# Altium PCB Transformer_25_3_caseD.PcbDoc
Units mm, origin at the board's own origin, x right, y up, seen from the top; angles counter-clockwise.
Board outline 118 x 78 mm, 6 copper layers (Top Layer, Layer 2, Layer 3, Layer 4, Layer 5, Bottom Layer), stack 0.816 mm thick; 4 components, 8 nets, 26 pads, 20 vias.
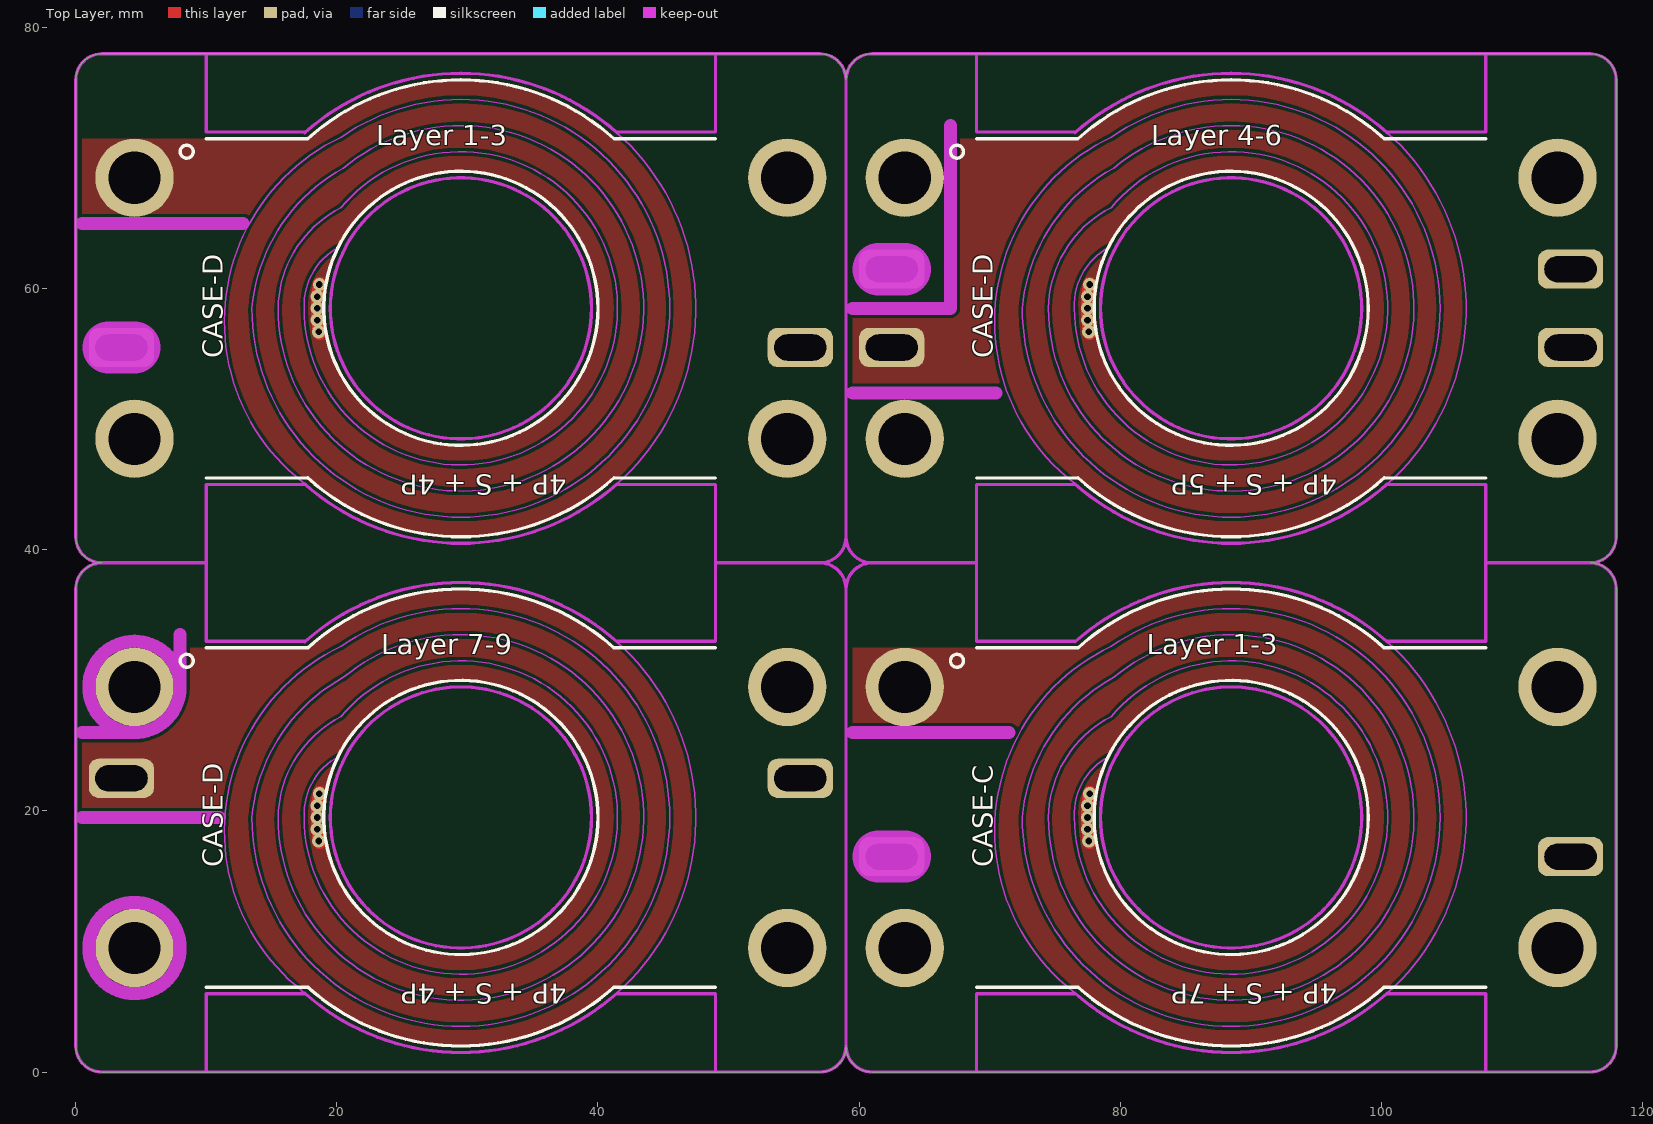
[diagram p0: Top Layer view]
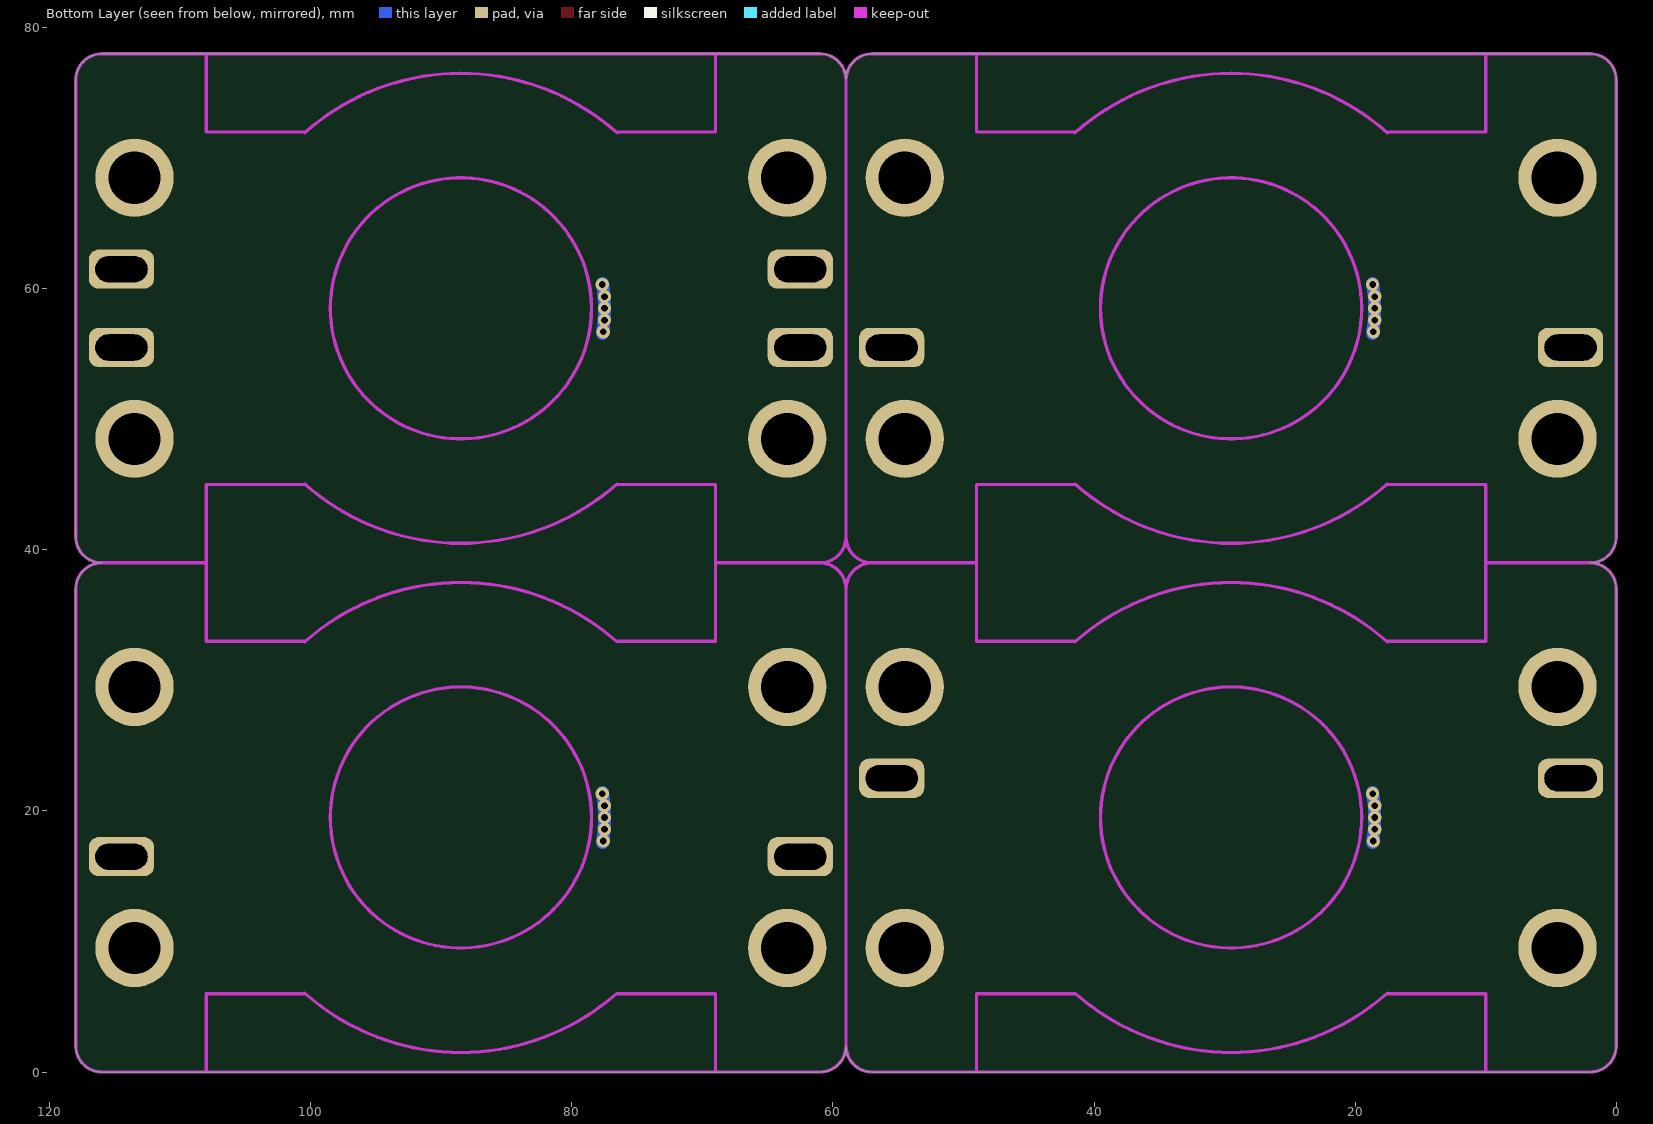
[diagram p1: Bottom Layer view, seen from below]
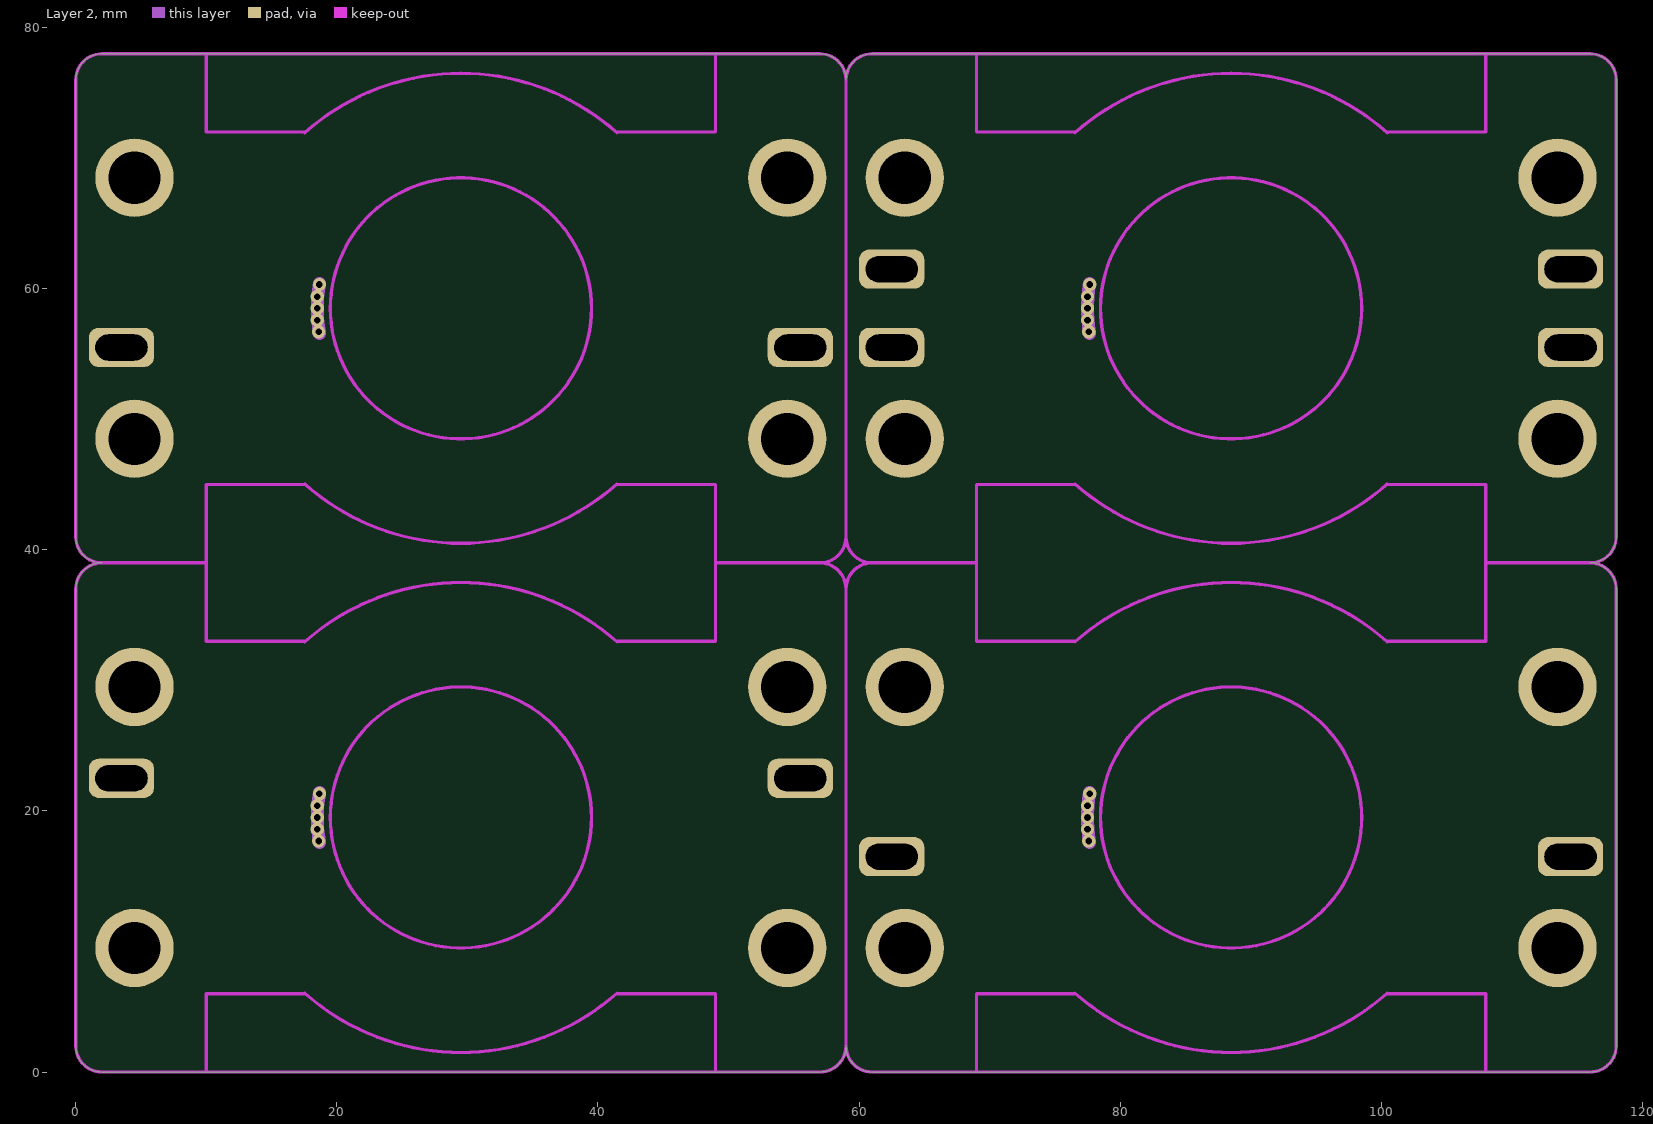
[diagram p2: Layer 2]
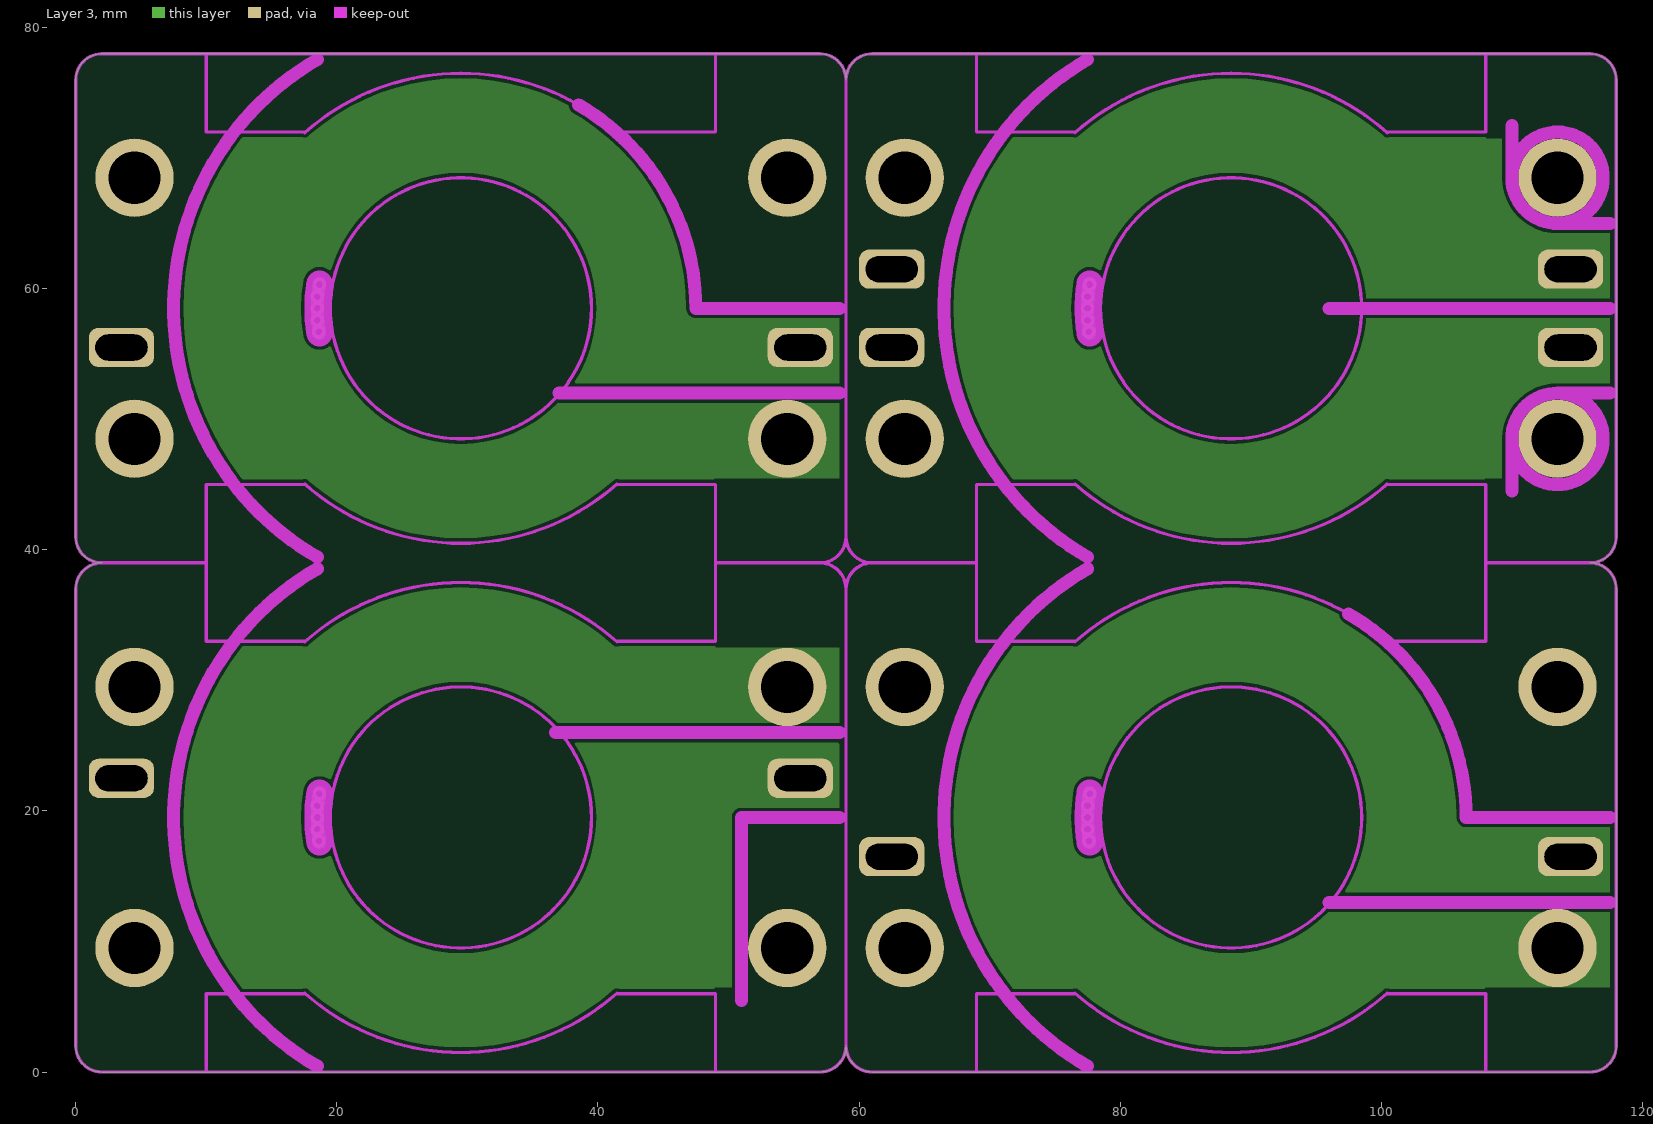
[diagram p3: Layer 3]
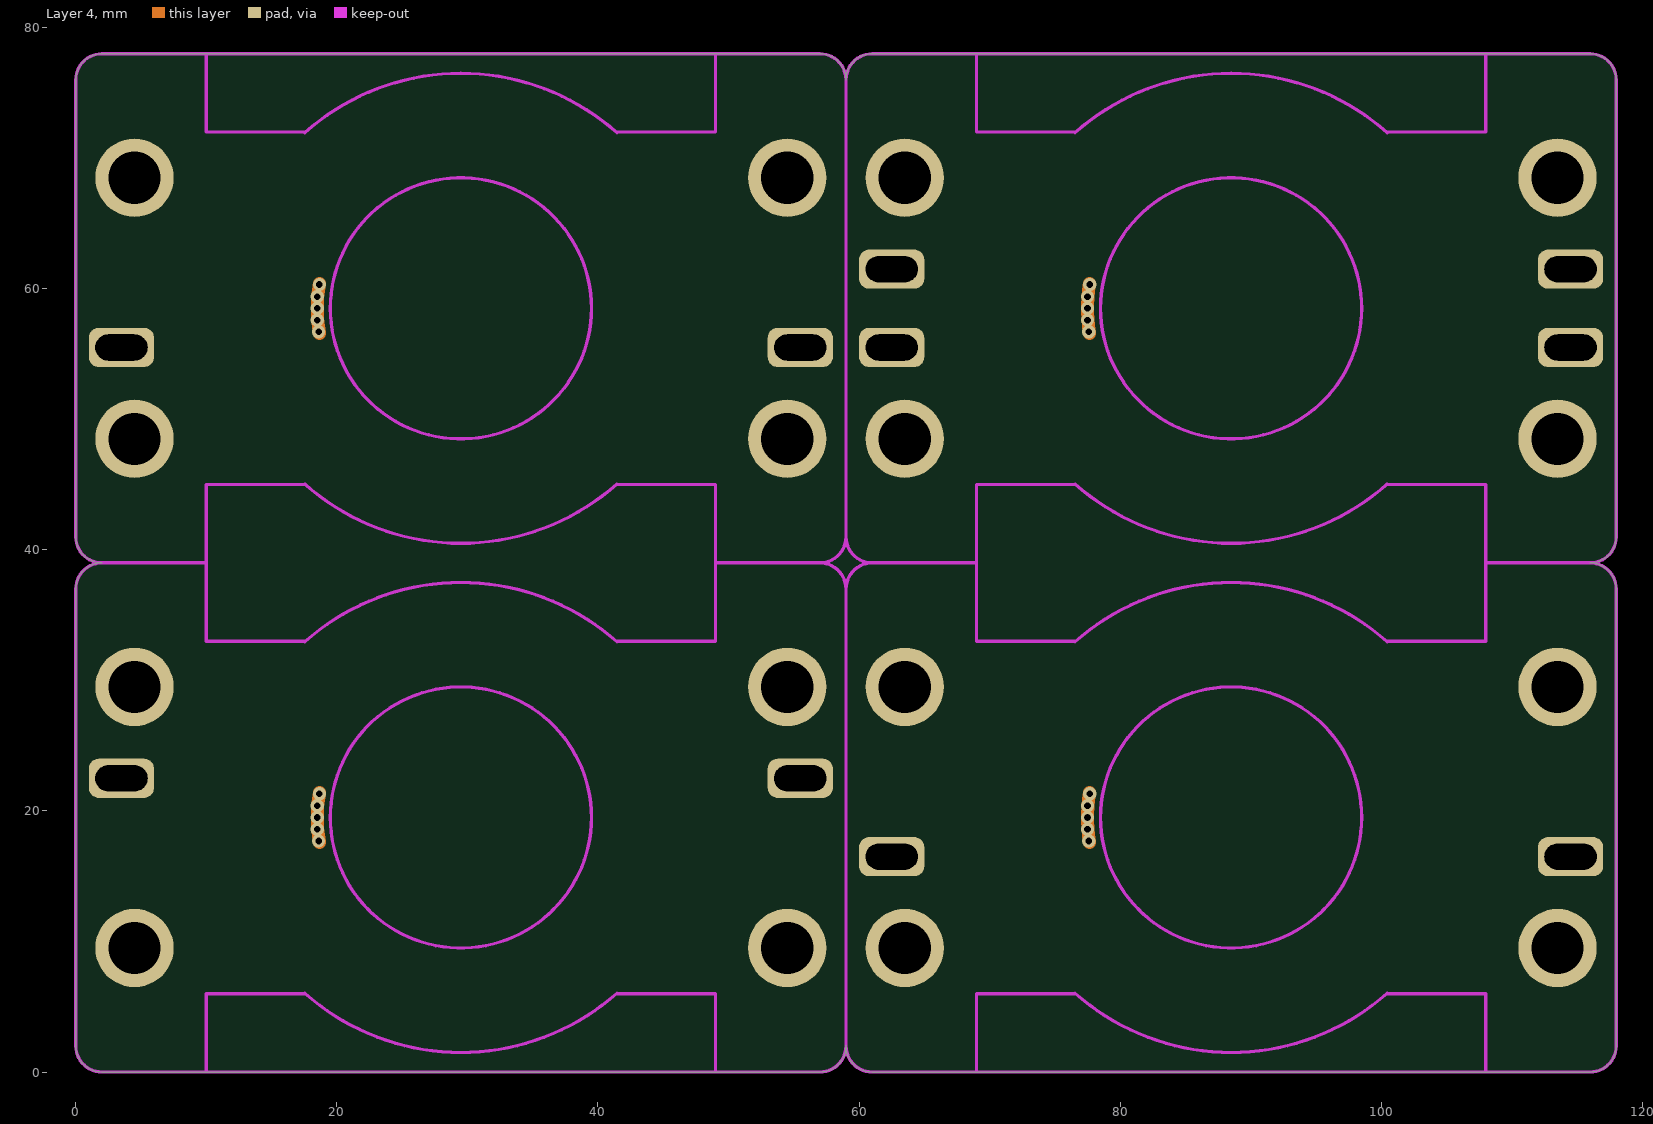
[diagram p4: Layer 4]
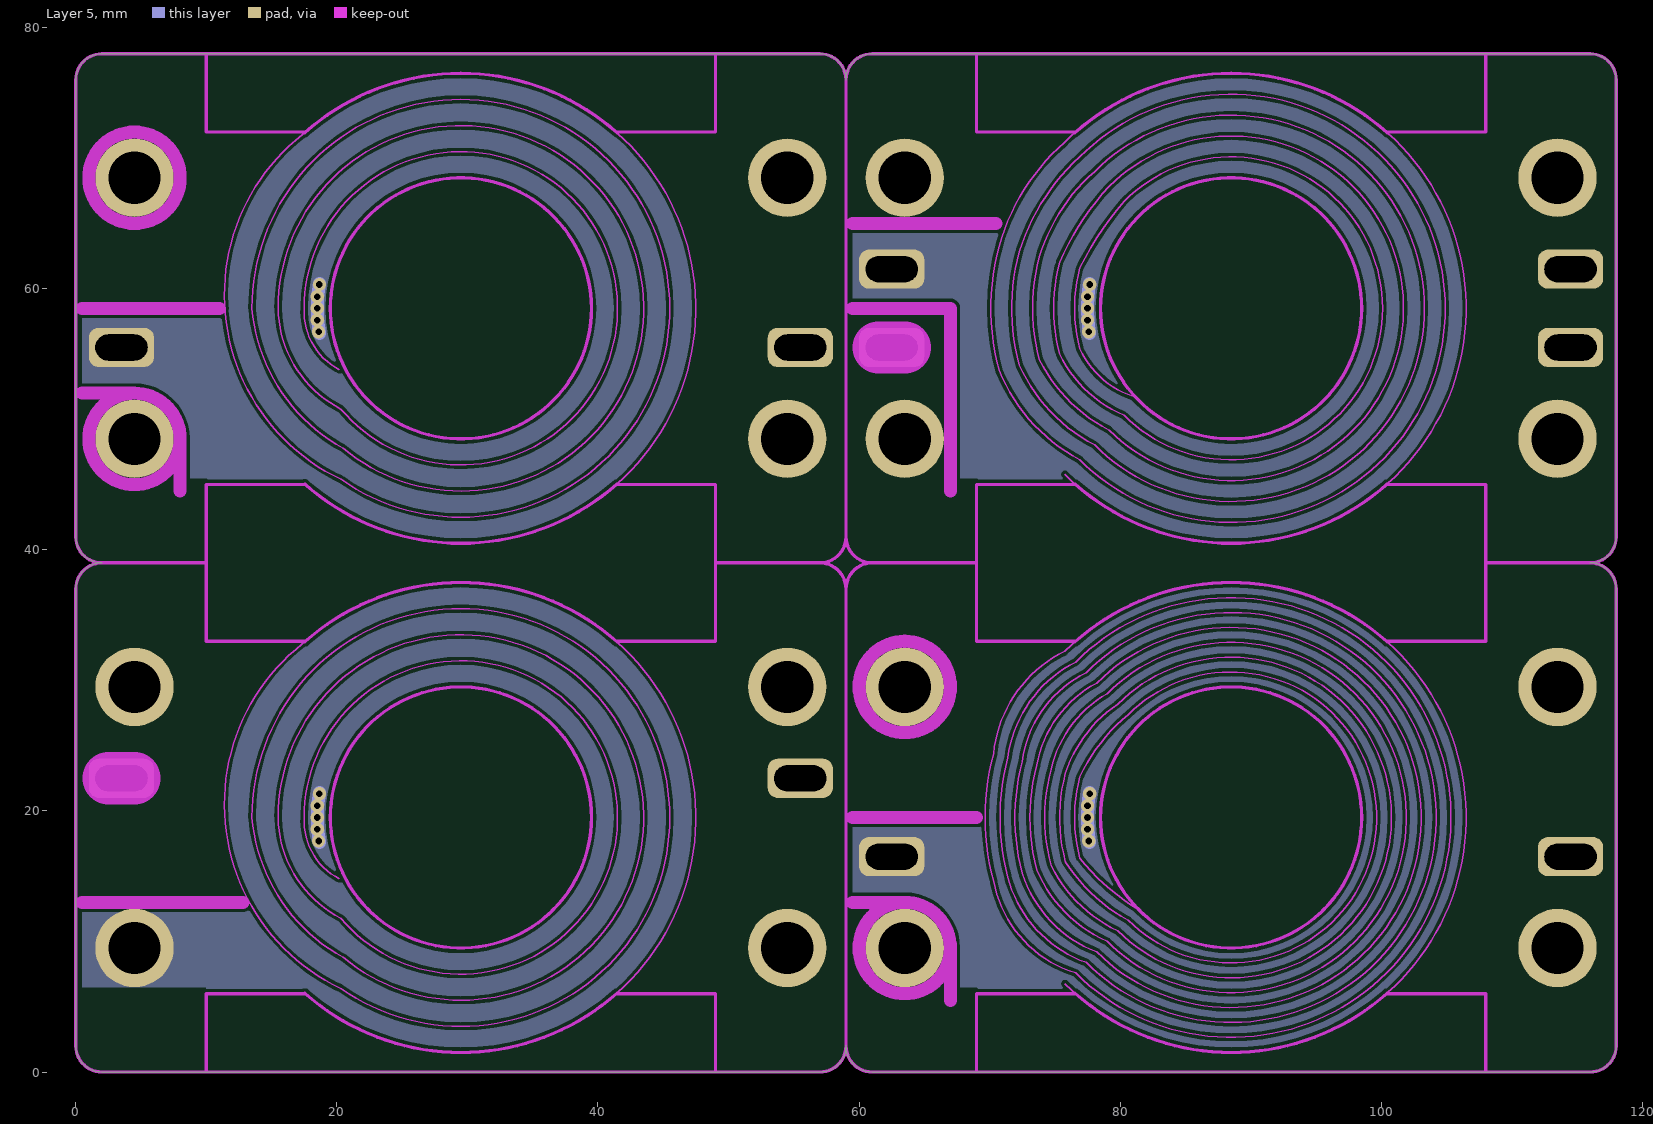
[diagram p5: Layer 5]

## Layer stack, top to bottom
Top Solder: solder mask 0.01, Solder Resist, Dk 3.5
Top Layer: signal copper 0.036
Dielectric 2: prepreg 0.071, PP-006, Dk 4.1
Layer 2: signal copper 0.035
Dielectric 4: prepreg 0.071, PP-006, Dk 4.1
Layer 3: signal copper 0.035
Dielectric 1: dielectric 0.32, FR-4, Dk 4.8
Layer 4: signal copper 0.035
Dielectric 5: prepreg 0.071, PP-006, Dk 4.1
Layer 5: signal copper 0.035
Dielectric 3: prepreg 0.071, PP-006, Dk 4.1
Bottom Layer: signal copper 0.036
Bottom Solder: solder mask 0.01, Solder Resist, Dk 3.5

## Board outline
0,2 0,37 cw(c2,37) 2,39 cw(c2,41) 0,41 0,76 cw(c2,76) 2,78 57,78 cw(c57,76) 59,76 cw(c61,76) 61,78 116,78 cw(c116,76) 118,76 118,41 cw(c116,41) 116,39 cw(c116,37) 118,37 118,2 cw(c116,2) 116,0 61,0 cw(c61,2) 59,2 cw(c57,2) 57,0 2,0 cw(c2,2)

## Design rules (kind name [scope] priority, off if disabled: settings)
Clearance [All] p1: gap=0.254 ignorepadtopadclearanceinfootprint=FALSE except(0: Arc-Hole Track-Hole SMDPad-Hole THPad-Hole Via-Hole Fill-Hole Poly-Hole Region-Hole Text-Hole)
ComponentClearance [All] p1: gap=0 collisioncheckmode=3 verticalgap=0 showdistances=FALSE
PlaneConnect [All] p1: planeconnectstyle=Direct reliefexpansion=0.508 reliefentries=4 reliefconductorwidth=0.254 reliefairgap=0.254
PolygonConnect [All] p1: connectstyle=Direct reliefconductorwidth=0.254 reliefentries=4 polygonreliefangle="90 Angle" airgapwidth=0.254
RoutingVias [All] p1: holewidth=0.711 width=1.27 viastyle="Through Hole" minholewidth=0.711 minwidth=1.27 maxholewidth=0.711 maxwidth=1.27
SolderMaskExpansion [All] p1: expansion=0.102 istentingtop=FALSE
Width [All] p1: maxlimit=1 minlimit=0.254 preferedwidth=0.254
28 further rules are at their usual default settings.

## Components (designator, comment, footprint, x,y, rotation, side; value= is the part's Value field where it differs from the comment)
"Layer 1-3" "Comment" "EQ40/20 CORE" 29.5,58.5 r270 top
"Layer 1-3" "Comment" "EQ40/20 CORE" 88.5,19.5 r270 top
"Layer 4-6" "Comment" "EQ40/20 CORE" 88.5,58.5 r270 top
"Layer 7-9" "Comment" "EQ40/20 CORE" 29.5,19.5 r270 top

## Footprints (in the part's own frame and the unit in brackets; to place one, negate y for a bottom-side part, rotate by r counter-clockwise, add the part's x,y. Pads: shape width x height; smd on the part's side, far side on the other; paste and mask are expansions set on the pad)
"EQ40/20 CORE" [mm]
  round 6 hole 4: 1(-10,-25) 3(10,-25) 6(10,25) 8(-10,25)
  Keep-Out Layer circle w0.254: c0,0 r10
  Keep-Out Layer lines w0.254: 19.5,-19.5 13.5,-19.5 13.5,-12 ; -19.5,-19.5 -13.5,-19.5 -13.5,-12 ; 13.453,-11.959 ccw(c0,0) 13.453,11.959 ; -13.453,-11.959 cw(c0,0) -13.453,11.959 ; 13.5,12 13.5,19.5 19.5,19.5 ; -13.5,12 -13.5,19.5 -19.5,19.5
  silkscreen extent -17.5,-21.5 17.5,19.5

## Free pads (board coordinates)
  rrect50% 5x3 hole 2 slot 4 at 0 deg: 2(3.5,22.5) 2(62.5,61.5) 4(3.5,55.5) 4(62.5,16.5) 4(62.5,55.5) 5(55.5,55.5) 5(114.5,16.5) 5(114.5,55.5) 7(55.5,22.5) 7(114.5,61.5)

## Via types
v1: diameter 1.016, hole 0.508, Top Layer to Bottom Layer, 20 vias

## Nets (pads, with @x,y where several pads share a name; then routed paths per layer and width w, separated by ;. In a path a pad name is that pad's centre, name@x,y a point inside that pad or via, vN(x,y) a via of type N, cw(c..) or ccw(c..) an arc to the next point about the centre after c; other vN are vias at no path point)
T1P: "Layer 1-3.1"@4.5,68.5 pad.4@3.5,55.5 | length 23
  Top Layer w1: v1@18.667,56.59 cw(c29.5,58.5) v1@18.667,60.41
  Layer 2 w1: v1@18.667,56.59 cw(c29.5,58.5) v1@18.667,60.41
  Layer 3 w1: v1@18.667,56.59 cw(c29.5,58.5) v1@18.667,60.41
  Layer 4 w1: v1@18.667,56.59 cw(c29.5,58.5) v1@18.667,60.41
  Layer 5 w1: v1@18.667,56.59 cw(c29.5,58.5) v1@18.667,60.41
  Bottom Layer w1: v1@18.667,56.59 cw(c29.5,58.5) v1@18.667,60.41
  other v1: 18.6,56.7 18.5,57.6 18.5,58.5 18.5,59.4 18.663,60.32
T1S: "Layer 1-3.6"@54.5,48.5 pad.5@55.5,55.5
T2P: pad.2@62.5,61.5 pad.4@62.5,55.5 | length 23
  Top Layer w1: v1@77.667,56.59 cw(c88.5,58.5) v1@77.667,60.41
  Layer 2 w1: v1@77.667,56.59 cw(c88.5,58.5) v1@77.667,60.41
  Layer 3 w1: v1@77.667,56.59 cw(c88.5,58.5) v1@77.667,60.41
  Layer 4 w1: v1@77.667,56.59 cw(c88.5,58.5) v1@77.667,60.41
  Layer 5 w1: v1@77.667,56.59 cw(c88.5,58.5) v1@77.667,60.41
  Bottom Layer w1: v1@77.667,56.59 cw(c88.5,58.5) v1@77.667,60.41
  other v1: 77.6,56.7 77.5,57.6 77.5,58.5 77.5,59.4 77.663,60.32
T2S: pad.5@114.5,55.5 pad.7@114.5,61.5
T3P: "Layer 7-9.3" pad.2@3.5,22.5 | length 23
  Top Layer w1: v1@18.667,17.59 cw(c29.5,19.5) v1@18.667,21.41
  Layer 2 w1: v1@18.667,17.59 cw(c29.5,19.5) v1@18.667,21.41
  Layer 3 w1: v1@18.667,17.59 cw(c29.5,19.5) v1@18.667,21.41
  Layer 4 w1: v1@18.667,17.59 cw(c29.5,19.5) v1@18.667,21.41
  Layer 5 w1: v1@18.667,17.59 cw(c29.5,19.5) v1@18.667,21.41
  Bottom Layer w1: v1@18.667,17.59 cw(c29.5,19.5) v1@18.667,21.41
  other v1: 18.6,17.7 18.5,18.6 18.5,19.5 18.5,20.4 18.663,21.32
T3S: "Layer 7-9.8" pad.7@55.5,22.5
T4P: "Layer 1-3.1"@63.5,29.5 pad.4@62.5,16.5 | length 23
  Top Layer w1: v1@77.667,17.59 cw(c88.5,19.5) v1@77.667,21.41
  Layer 2 w1: v1@77.667,17.59 cw(c88.5,19.5) v1@77.667,21.41
  Layer 3 w1: v1@77.667,17.59 cw(c88.5,19.5) v1@77.667,21.41
  Layer 4 w1: v1@77.667,17.59 cw(c88.5,19.5) v1@77.667,21.41
  Layer 5 w1: v1@77.667,17.59 cw(c88.5,19.5) v1@77.667,21.41
  Bottom Layer w1: v1@77.667,17.59 cw(c88.5,19.5) v1@77.667,21.41
  other v1: 77.6,17.7 77.5,18.6 77.5,19.5 77.5,20.4 77.663,21.32
T4S: "Layer 1-3.6"@113.5,9.5 pad.5@114.5,16.5
pads on no net: "Layer 1-3.3" "Layer 1-3.8" "Layer 4-6.1" "Layer 4-6.3" "Layer 4-6.6" "Layer 4-6.8" "Layer 7-9.1" "Layer 7-9.6"

## Polygon pours and split planes (outlines as drawn)
T4P on Top Layer "T4P_L01_P010" (solid, remove dead copper, pour order 10): 110,32.5 108,32.5 108,38 69,38 69,32.5 59.5,32.5 59.5,6.5 69,6.5 69,1 108,1 108,6.5 110,6.5
T3P on Top Layer "T3P_L01_P006" (solid, remove dead copper, pour order 6): 51,32.5 49,32.5 49,38 10,38 10,32.5 0.5,32.5 0.5,6.5 10,6.5 10,1 49,1 49,6.5 51,6.5
T2P on Top Layer "T2P_L01_P004" (solid, remove dead copper, pour order 4): 110,71.5 108,71.5 108,77 69,77 69,71.5 59.5,71.5 59.5,45.5 69,45.5 69,40 108,40 108,45.5 110,45.5
T1P on Top Layer "T1P_L01_P000" (solid, remove dead copper, pour order 0): 51,71.5 49,71.5 49,77 10,77 10,71.5 0.5,71.5 0.5,45.5 10,45.5 10,40 49,40 49,45.5 51,45.5
T4S on Layer 3 "T4S_L03_P011" (solid, remove dead copper, pour order 11): 67,32.5 69,32.5 69,38 108,38 108,32.5 117.5,32.5 117.5,6.5 108,6.5 108,1 69,1 69,6.5 67,6.5
T3S on Layer 3 "T3S_L03_P007" (solid, remove dead copper, pour order 7): 8,32.5 10,32.5 10,38 49,38 49,32.5 58.5,32.5 58.5,6.5 49,6.5 49,1 10,1 10,6.5 8,6.5
T1S on Layer 3 "T1S_L03_P002" (solid, remove dead copper, pour order 2): 8,71.5 10,71.5 10,77 49,77 49,71.5 58.5,71.5 58.5,45.5 49,45.5 49,40 10,40 10,45.5 8,45.5
T2S on Layer 3 "T2S_L03_P001" (solid, remove dead copper, pour order 1): 67,71.5 69,71.5 69,77 108,77 108,71.5 117.5,71.5 117.5,45.5 108,45.5 108,40 69,40 69,45.5 67,45.5
T4P on Layer 5 "T4P_L05_P012" (solid, remove dead copper, pour order 12): 110,32.5 108,32.5 108,38 69,38 69,32.5 59.5,32.5 59.5,6.5 69,6.5 69,1 108,1 108,6.5 110,6.5
T3P on Layer 5 "T3P_L05_P009" (solid, remove dead copper, pour order 9): 51,6.5 49,6.5 49,1 10,1 10,6.5 0.5,6.5 0.5,32.5 10,32.5 10,38 49,38 49,32.5 51,32.5
T1P on Layer 5 "T1P_L05_P005" (solid, remove dead copper, pour order 5): 51,71.5 49,71.5 49,77 10,77 10,71.5 0.5,71.5 0.5,45.5 10,45.5 10,40 49,40 49,45.5 51,45.5
T2P on Layer 5 "T2P_L05_P003" (solid, remove dead copper, pour order 3): 110,71.5 108,71.5 108,77 69,77 69,71.5 59.5,71.5 59.5,45.5 69,45.5 69,40 108,40 108,45.5 110,45.5

## Keep-outs
Top Layer:
  circle w1: c4.5,9.5 r3.5
  circle w1: c4.5,29.5 r3.5
  lines w0.1: 17.9,5.8 cw(c26.999,18.49) 20.323,32.606 cw(c29.5,19.5) 13.5,19.5 cw(c27.026,18.318) 20.501,30.225 cw(c29.5,19.5) 15.5,19.5 cw(c24.317,19.359) 20.307,27.213 cw(c29.5,19.5) 17.5,19.5 cw(c22.472,19.769) 20.2,24.2 ; 17.9,44.8 cw(c26.999,57.49) 20.323,71.606 cw(c29.5,58.5) 13.5,58.5 cw(c27.026,57.318) 20.501,69.225 cw(c29.5,58.5) 15.5,58.5 cw(c24.317,58.359) 20.307,66.213 cw(c29.5,58.5) 17.5,58.5 cw(c22.472,58.769) 20.2,63.2 ; 38.5,3.912 ccw(c29.5,19.5) 38.5,35.088 ; 38.5,42.912 ccw(c29.5,58.5) 38.5,74.088 ; 76.9,5.8 cw(c85.999,18.49) 79.323,32.606 cw(c88.5,19.5) 72.5,19.5 cw(c86.026,18.318) 79.501,30.225 cw(c88.5,19.5) 74.5,19.5 cw(c83.317,19.359) 79.307,27.213 cw(c88.5,19.5) 76.5,19.5 cw(c81.472,19.769) 79.2,24.2 ; 76.9,44.8 cw(c85.999,57.49) 79.323,71.606 cw(c88.5,58.5) 72.5,58.5 cw(c86.026,57.318) 79.501,69.225 cw(c88.5,58.5) 74.5,58.5 cw(c83.317,58.359) 79.307,66.213 cw(c88.5,58.5) 76.5,58.5 cw(c81.472,58.769) 79.2,63.2 ; 97.5,3.912 ccw(c88.5,19.5) 97.5,35.088 ; 97.5,42.912 ccw(c88.5,58.5) 97.5,74.088
  lines w1: 0.5,19.5 11,19.5 ; 0.5,26 4.5,26 ; 0.5,65 12.8,65 ; 8,29.5 8,33.5 ; 59.5,26 71.5,26 ; 59.5,52 70.5,52 ; 59.5,58.5 67,58.5 67,72.5
  lines w4: 2.5,55.5 4.5,55.5 ; 61.5,16.5 63.5,16.5 ; 61.5,61.5 63.5,61.5
Layer 3:
  circle w1: c113.5,48.5 r3.5
  circle w1: c113.5,68.5 r3.5
  lines w1: 18.5,0.447 cw(c29.5,19.5) 18.5,38.553 ; 18.5,39.447 cw(c29.5,58.5) 18.5,77.553 ; 36.75,26 58.5,26 ; 37,52 58.5,52 ; 38.5,74.088 cw(c29.5,58.5) 47.5,58.5 ; 47.499,58.5 58.5,58.5 ; 51,5.5 51,19.5 58.5,19.5 ; 77.5,0.447 cw(c88.5,19.5) 77.5,38.553 ; 77.5,39.447 cw(c88.5,58.5) 77.5,77.553 ; 96,13 117.5,13 ; 96,58.5 117.5,58.5 ; 97.5,35.088 cw(c88.5,19.5) 106.5,19.5 ; 106.499,19.5 117.5,19.5 ; 110,44.5 110,48.5 ; 110,68.5 110,72.5 ; 113.5,52 117.5,52 ; 113.5,65 117.5,65
  lines w2: 18.667,17.59 cw(c29.5,19.5) 18.667,21.41 ; 18.667,56.59 cw(c29.5,58.5) 18.667,60.41 ; 77.667,17.59 cw(c88.5,19.5) 77.667,21.41 ; 77.667,56.59 cw(c88.5,58.5) 77.667,60.41
Layer 5:
  circle w1: c63.5,9.5 r3.5
  circle w1: c63.5,29.5 r3.5
  circle w1: c4.5,68.5 r3.5
  circle w1: c4.5,48.5 r3.5
  lines w0.1: 17.9,33.2 ccw(c26.999,20.51) 20.323,6.394 ccw(c29.5,19.5) 13.5,19.5 ccw(c27.026,20.682) 20.501,8.775 ccw(c29.5,19.5) 15.5,19.5 ccw(c24.317,19.641) 20.307,11.787 ccw(c29.5,19.5) 17.5,19.5 ccw(c22.472,19.231) 20.2,14.8 ; 17.9,72.2 ccw(c26.999,59.51) 20.323,45.394 ccw(c29.5,58.5) 13.5,58.5 ccw(c27.026,59.682) 20.501,47.775 ccw(c29.5,58.5) 15.5,58.5 ccw(c24.317,58.641) 20.307,50.787 ccw(c29.5,58.5) 17.5,58.5 ccw(c22.472,58.231) 20.2,53.8 ; 38.5,3.912 ccw(c29.5,19.5) 38.5,35.088 ; 38.5,42.912 ccw(c29.5,58.5) 38.5,74.088 ; 75.772,6.772 ccw(c88.5,19.5) 75.772,32.228 ccw(c80.039,23.424) 70.302,24.376 ccw(c88.5,19.5) 70.302,14.624 ccw(c79.281,16.327) 76.592,7.592 ccw(c88.5,19.5) 76.592,31.408 ccw(c80.942,22.826) 71.403,24.081 ccw(c88.5,19.5) 71.403,14.919 ccw(c80.54,17.304) 77.398,8.398 ccw(c88.5,19.5) 77.398,30.602 ccw(c81.367,22.587) 72.504,23.786 ccw(c88.5,19.5) 72.504,15.214 ccw(c81.633,18.165) 78.205,9.205 ccw(c88.5,19.5) 78.205,29.795 ccw(c82.393,21.91) 73.605,23.491 ccw(c88.5,19.5) 73.605,15.509 ccw(c83.281,19.615) 79.011,10.011 ccw(c88.5,19.5) 79.011,28.989 ccw(c83.514,21.148) 74.707,23.196 ccw(c88.5,19.5) 74.707,15.804 ccw(c84.553,20.782) 79.817,10.817 ccw(c88.5,19.5) 79.817,28.183 ccw(c85.632,19.607) 75.808,22.901 ccw(c88.5,19.5) 75.808,16.099 ccw(c87.14,23.461) 80.623,11.623 ccw(c88.5,19.5) 80.623,27.377 ccw(c89.306,16.787) 76.909,22.606 ccw(c88.5,19.5) 76.909,16.394 ccw(c90.1,26.872) 81.429,12.429 ; 75.772,45.772 ccw(c88.5,58.5) 75.772,71.228 ccw(c86.506,58.849) 70.727,63.262 ccw(c88.5,58.5) 70.727,53.738 ccw(c83.33,58.92) 76.903,46.903 ccw(c88.5,58.5) 76.903,70.097 ccw(c87.997,57.905) 72.272,62.848 ccw(c88.5,58.5) 72.272,54.152 ccw(c84.057,59.481) 78.035,48.035 ccw(c88.5,58.5) 78.035,68.965 ccw(c87.008,58.545) 73.818,62.434 ccw(c88.5,58.5) 73.818,54.566 ccw(c84.72,60.016) 79.166,49.166 ccw(c88.5,58.5) 79.166,67.834 ccw(c93.816,54.101) 75.363,62.02 ccw(c88.5,58.5) 75.363,54.98 ccw(c84.179,59.328) 80.298,50.298 ccw(c88.5,58.5) 80.298,66.702 ccw(c100.084,49.872) 76.909,61.606 ccw(c88.5,58.5) 76.909,55.394 ccw(c83.168,58.302) 81,51.75
  lines w1: 0.5,13 12.8,13 ; 0.5,52 4.5,52 ; 0.5,58.5 11,58.5 ; 8,44.5 8,48.5 ; 59.5,13 63.5,13 ; 59.5,19.5 69,19.5 ; 59.5,58.5 67,58.5 67,44.5 ; 59.5,65 70.5,65 ; 67,5.5 67,9.5
  lines w4: 2.5,22.5 4.5,22.5 ; 61.5,55.5 63.5,55.5
Keep-Out Layer:
  lines w0.254: 10,39 2,39 ; 49,39 57,39 ; 69,39 61,39 ; 108,39 116,39 ; 2,39 cw(c2,41) 0,41 0,76 cw(c2,76) 2,78 57,78 cw(c57,76) 59,76 ; 2,39 ccw(c2,37) 0,37 0,2 ccw(c2,2) 2,0 57,0 ccw(c57,2) 59,2 ; 57,39 ccw(c57,41) 59,41 ; 57,39 cw(c57,37) 59,37 ; 59,2 ccw(c61,2) 61,0 116,0 ccw(c116,2) 118,2 118,37 ccw(c116,37) 116,39 ; 59,2 59,37 ; 59,37 cw(c61,37) 61,39 ; 59,41 ccw(c61,41) 61,39 ; 59,41 59,76 ; 59,76 cw(c61,76) 61,78 116,78 cw(c116,76) 118,76 118,41 cw(c116,41) 116,39

## Silkscreen, mask and mechanical layers (free items; w line width, h text height)
Top Overlay:
  text "CASE-D" at 11.246,54.683 h1.52 r90
  text "CASE-D" at 70.246,54.683 h1.52 r90
  text "4P + S + 4P" at 37.625,45.746 h1.52 r180
  text "4P + S + 5P" at 96.625,45.746 h1.52 r180
  text "CASE-D" at 11.246,15.683 h1.52 r90
  text "CASE-C" at 70.246,15.683 h1.52 r90
  text "4P + S + 4P" at 37.625,6.746 h1.52 r180
  text "4P + S + 7P" at 96.625,6.746 h1.52 r180